# Altium PCB Sensor_breakout.PcbDoc
Units mm, origin at the board's own origin, x right, y up, seen from the top; angles counter-clockwise.
Board outline 28.19 x 26.52 mm, 2 copper layers (Top Layer, Bottom Layer); 7 components, 7 nets, 33 pads, 35 vias.
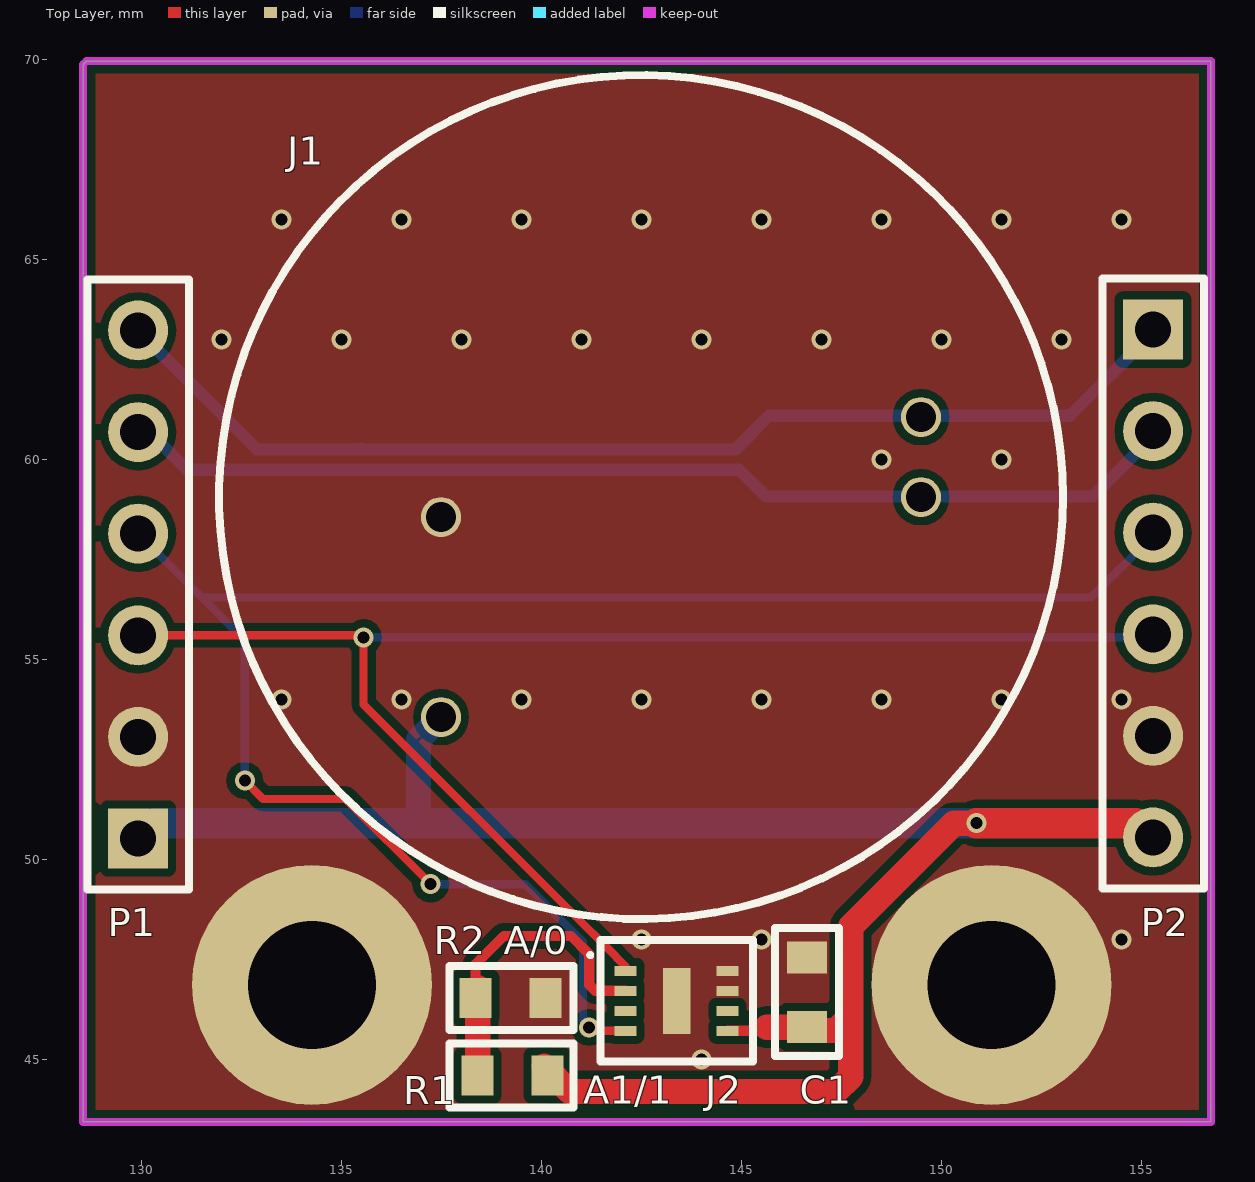
[diagram p0: Top Layer view]
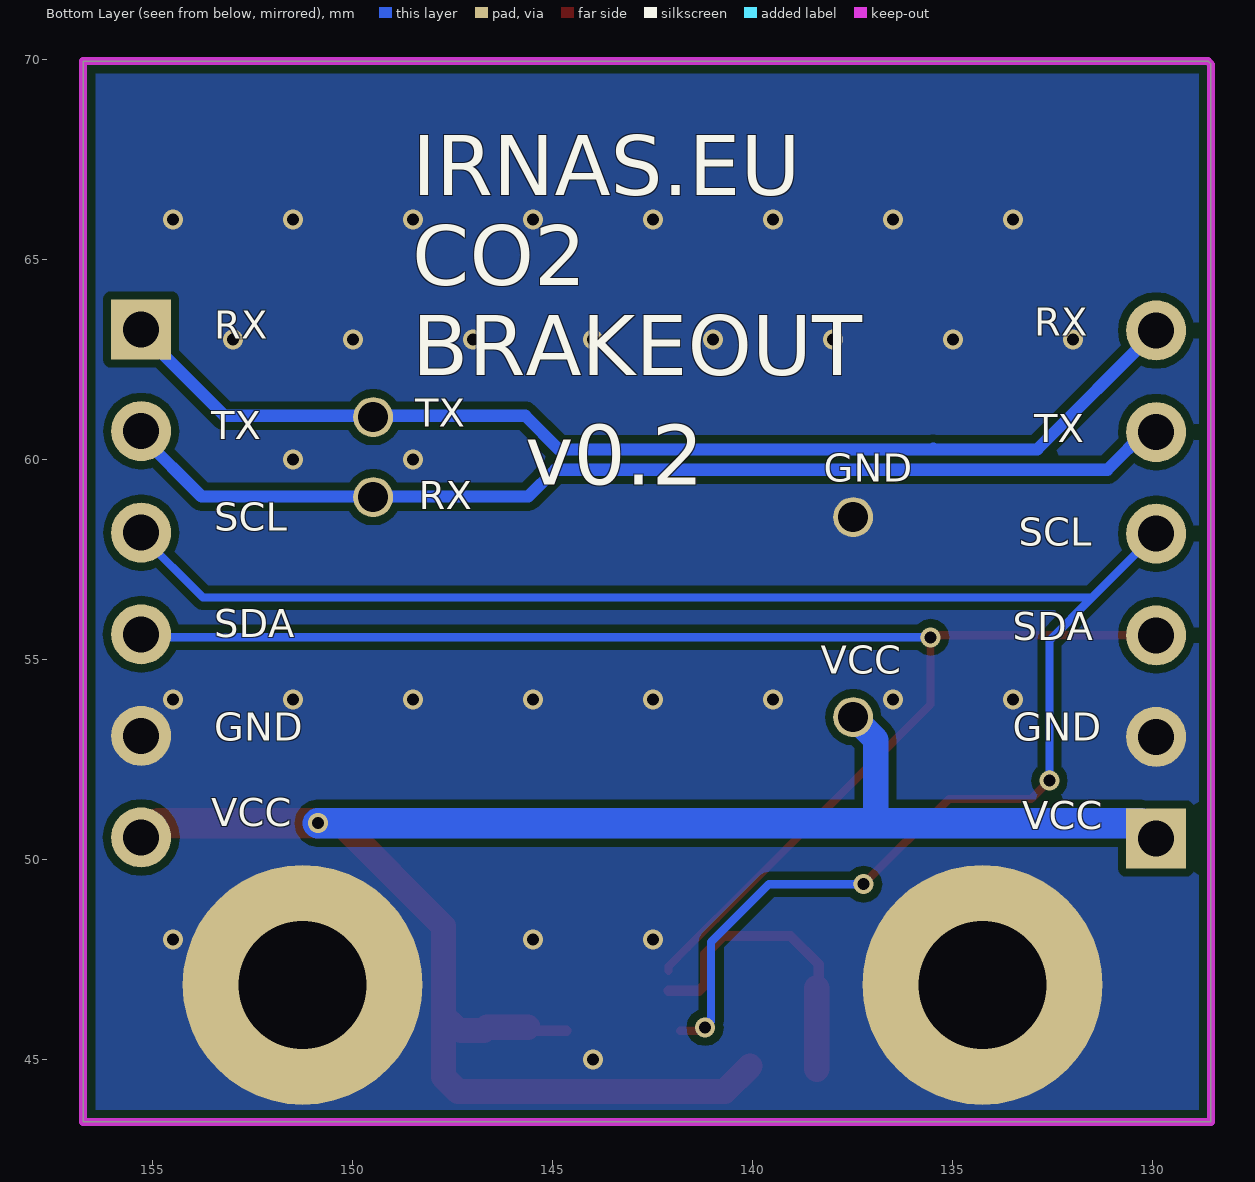
[diagram p1: Bottom Layer view, seen from below]

## Layer stack, top to bottom
Top Solder: solder mask 0.0102, Solder Resist, Dk 3.5
Top Layer: signal copper 0.0356
Dielectric 1: dielectric 0.32, FR-4, Dk 4.8
Bottom Layer: signal copper 0.0356
Bottom Solder: solder mask 0.0102, Solder Resist, Dk 3.5

## Board outline
128.549,43.434 156.743,43.434 156.743,69.952 128.626,69.952 128.549,69.875

## Design rules (kind name [scope] priority, off if disabled: settings)
Clearance [All] p1: gap=0.203 ignorepadtopadclearanceinfootprint=FALSE except(0: Arc-Hole Track-Hole SMDPad-Hole THPad-Hole Via-Hole Fill-Hole Poly-Hole Region-Hole Text-Hole)
HoleSize [All] p1: absolutevalues=TRUE maxlimit=4 minlimit=0.025 maxpercent=80.000 minpercent=20.000
MinimumSolderMaskSliver [All] p1: minsoldermaskwidth=0.025
PolygonConnect [All] p1: connectstyle=Direct reliefconductorwidth=0.254 reliefentries=4 polygonreliefangle="90 Angle" airgapwidth=0.254
RoutingVias [All] p1: holewidth=0.3 width=0.4 viastyle="Through Hole" minholewidth=0.3 minwidth=0.5 maxholewidth=0.3 maxwidth=0.5
SilkToSolderMaskClearance [IsPad] p1: minsilkscreentomaskgap=0.025 clearancetoexposedcopper=TRUE
SolderMaskExpansion [All] p1: expansion=0.102
Width [All] p1: maxlimit=0.762 minlimit=0.203 preferedwidth=0.305
27 further rules are at their usual default settings.

## Components (designator, comment, footprint, x,y, rotation, side; value= is the part's Value field where it differs from the comment)
C1 "100nF" CAP0603 146.685,46.787 r270 top
J1 "CO2" CO2 142.494,59.055 r0 top
J2 "Humidity and Temp sensor" SHT3x-DIS 143.408,46.406 r0 top
P1 "Header 6" HDR1X6 129.921,50.521 r90 top
P2 "Header 6" HDR1X6 155.296,63.246 r270 top
R1 "0R" RES0603 139.446,44.577 r0 top
R2 "0R" RES0603 139.065,46.558 r180 top

## Footprints (in the part's own frame and the unit in brackets; to place one, negate y for a bottom-side part, rotate by r counter-clockwise, add the part's x,y. Pads: shape width x height; smd on the part's side, far side on the other; paste and mask are expansions set on the pad)
CAP0603 [mm]
  rect 0.8x1 smd paste+0 mask+0.102: 1(-0.763,-0.04) 2(0.983,-0.04)
  silkscreen extent -1.49,-0.84 1.71,0.76, body extent -0.69,-0.44 0.91,0.36, height 0.45
CO2 [mm]
  round 1 hole 0.75: 1(-5,-0.5) 2(-5,-5.5) 3(7,0) 4(7,2)
  silkscreen extent -10.55,-10.55 10.55,10.55, body extent -10.45,-10.45 10.45,10.45, height 18.05
HDR1X6 [mm] "Connector; Header; 6 Position"
  rect 1.5x1.5 hole 0.9: 1(0,0)
  round 1.5 hole 0.9: 2(2.54,0) 3(5.08,0) 4(7.62,0) 5(10.16,0) 6(12.7,0)
  silkscreen extent -1.27,-1.27 13.97,1.27
RES0603 [mm]
  rect 0.8x1 smd paste+0 mask+0.102: 1(-1.039,0.02) 2(0.708,0.02)
  silkscreen extent -1.74,-0.78 1.36,0.82, body extent -0.97,-0.38 0.63,0.42, height 0.45
SHT3x-DIS [mm]
  rect 0.55x0.25 smd: 1(-1.3,0.807) 2(-1.3,0.307) 3(-1.3,-0.193) 4(-1.3,-0.693) 5(1.25,-0.693) 6(1.25,-0.193) 7(1.25,0.307) 8(1.25,0.807)
  rect 0.69x1.65 smd: 9(-0.025,0.057)
  silkscreen extent -2.23,-1.47 1.88,1.58, body extent -1.33,-1.24 1.27,1.36, height 0.8

## Part data
J2: library part "Humidity and Temp"
P1 P2: "Header, 6-Pin", LatestRevisionDate=17-Jul-2002, LatestRevisionNote="Re-released for DXP Platform.", Publisher="Altium Limited"
R1 R2: "Thick Film Resistors - SMD 0.0ohm 1%", Manufacturer=Yageo, Manufacturer Part Number=RC0603FR-070RL, Operating Temperature="-55°C ~ 155°C", Package / Case="0603 (1608 Metric)", Power (Watts)="0.1W, 1/10W", Resistance (Ohms)=0.0, Standard Package=5,000, Supplier Device Package=0603, Supplier Part Number 1=2309106, Temperature Coefficient=-, Tolerance=Jumper, Catalog Drawings="Thick Film Resistor Side", Category=Resistors, Composition="Thick Film", EDA / CAD Models="Download from Accelerated Designs", Family="Chip Resistor - Surface Mount", Features="Moisture Resistant", Height="0.022\" (0.55mm)", HTML Datasheet="RC Series, L Suffix Datasheet.html", Number of Terminations=2, Online Catalog="RC0603 Series", Other Names="311-0.0HRTR  Q3106287A  RC0603FR-070RL-ND", Packaging="Tape & Reel (TR)", PCN Other="RC/AC 0603/0805/1206 22/Jan/2013", Pricing 1="10=0.021, 100=0.018, 500=0.0126, 1000=0.0105, 2500=0.0079 (GBP)", Product Training Modules="Chip Resistor", Series=RC, Size / Dimension="0.063\" L x 0.031\" W (1.60mm x 0.80mm)", Stock 1=12704, Supplier 1=Farnell

## Free pads (board coordinates)
  round 6 hole 3.2: 2(151.257,46.863) 3(134.264,46.863)

## Via types
v1: diameter 0.5, hole 0.3, Top Layer to Bottom Layer, tented both sides, 35 vias

## Nets (pads, with @x,y where several pads share a name; then routed paths per layer and width w, separated by ;. In a path a pad name is that pad's centre, name@x,y a point inside that pad or via, vN(x,y) a via of type N, cw(c..) or ccw(c..) an arc to the next point about the centre after c; other vN are vias at no path point)
GND: C1.1 J1.1 J2.7 J2.8 J2.9 P1.2 P2.5 pad.2 pad.3 R2.1
  other v1: 144,45 142.5,48 145.5,48 154.5,48 133.5,54 136.5,54 139.5,54 142.5,54 145.5,54 148.5,54 151.5,54 154.5,54 148.5,60 151.5,60 132,63 135,63 138,63 141,63 144,63 147,63 150,63 153,63 133.5,66 136.5,66 139.5,66 142.5,66 145.5,66 148.5,66 151.5,66 154.5,66
NetJ2_2: J2.2 R1.1 R2.2 | length 7.6
  Top Layer w0.254: R2.2@138.357,46.843 138.357,47.375 139.065,48.082 140.741,48.082 141.199,47.625 141.199,46.863 141.349,46.713 J2.2
  Top Layer w0.635: R1.1@138.407,44.749 R2.2@138.407,46.793
RX: J1.3 P1.5 P2.2 | length 26.5
  Bottom Layer w0.305: P1.5@130.15,60.731 131.14,59.741 134.388,59.741 ; 134.389,59.74 135.484,59.74 144.945,59.74 145.616,59.069 153.786,59.069 P2.2@155.296,60.579
SCL: J2.4 P1.4 P2.3 | length 44.7
  Top Layer w0.203: v1(132.588,51.968) 133.045,51.511 135.103,51.511 v1(137.236,49.378) ; v1(141.199,45.796) 141.282,45.713 141.82,45.713
  Bottom Layer w0.203: P1.4 131.521,56.54 ; v1(132.588,51.968) 132.588,55.474 131.521,56.54 ; v1(137.236,49.378) 139.598,49.378 141.046,47.93 141.046,45.949 v1(141.199,45.796) ; P2.3@155.296,58.09 153.746,56.54 131.521,56.54
SDA: J2.1 P1.3 P2.4 | length 36.5
  Top Layer w0.203: P1.3 v1@135.56,55.601 ; v1(135.56,55.55) 135.56,53.873 140.919,48.514 ; 140.92,48.514 141.63,47.804 ; 141.63,47.803 142.108,47.325 J2.1 ; P2.4@155.245,55.601 P2.4@155.296,55.55
  Bottom Layer w0.203: v1(135.56,55.55) P2.4@155.296,55.55
TX: J1.4 P1.6 P2.1 | length 27.8
  Bottom Layer w0.305: P1.6 132.893,60.249 134.599,60.249 ; 134.599,60.248 135.484,60.248 135.484,60.252 ; 135.494,60.262 135.508,60.248 144.856,60.248 145.695,61.087 153.213,61.087 P2.1@155.296,63.17
VCC: C1.2 J1.2 J2.5 P1.1 P2.6 R1.2 | length 47.7
  Top Layer w0.254: J2.5 145.542,45.713 145.633,45.804
  Top Layer w0.635: R1.2@140.077,44.826 140.707,44.196 147.371,44.196 147.736,44.561 147.736,46.085 ; 145.633,45.804 C1.2 146.729,45.72 147.295,45.72 ; 147.455,45.804 147.736,46.085 ; v1(150.876,50.902) 150.317,50.902 147.736,48.321 147.736,46.085
  Top Layer w0.762: v1(150.876,50.902) 154.864,50.902 P2.6@155.296,50.47
  Bottom Layer w0.635: 136.931,50.902 136.931,52.992 J1.2
  Bottom Layer w0.762: P1.1 130.302,50.902 136.931,50.902 v1(150.876,50.902)
pads on no net: J2.3 J2.6

## Polygon pours and split planes (outlines as drawn)
GND on Bottom Layer "GND" (solid, pour order 1): 128.549,43.434 156.743,43.434 156.743,69.952 128.626,69.952 128.549,69.875
GND on Top Layer "GND" (solid, pour order 0): 128.549,43.434 156.743,43.434 156.743,69.952 128.626,69.952 128.549,69.875

## Keep-outs
Keep-Out Layer:
  lines w0.2: 128.549,43.434 156.743,43.434 156.743,69.952 142.723,69.952 128.626,69.952 128.549,69.875 128.549,43.434

## Other copper
Top Layer:
  region net SDA: 135.56,55.601

## Silkscreen, mask and mechanical layers (free items; w line width, h text height)
Top Overlay:
  text "A/0" at 139.065,47.625 h0.7
  text "A1/1" at 141.046,43.891 h0.7
Bottom Overlay:
  text "IRNAS.EU" at 148.514,66.599 h1.5
  text "RX" at 132.969,63.094 h0.7
  text "RX" at 153.467,63.017 h0.7
  text "CO2  / BRAKEOUT" at 148.514,62.103 h1.5
  text "TX" at 148.438,60.808 h0.7
  text "TX" at 153.543,60.503 h0.7
  text "TX" at 132.969,60.427 h0.7
  text "GND" at 138.227,59.436 h0.7
  text "v0.2" at 145.694,59.36 h1.5
  text "RX" at 148.361,58.75 h0.7
  text "SCL" at 153.467,58.217 h0.7
  text "SCL" at 133.35,57.836 h0.7
  text "SDA" at 153.467,55.55 h0.7
  text "SDA" at 133.502,55.474 h0.7
  text "VCC" at 138.303,54.635 h0.7
  text "GND" at 133.502,52.959 h0.7
  text "GND" at 153.467,52.959 h0.7
  text "VCC" at 153.543,50.825 h0.7
  text "VCC" at 133.274,50.749 h0.7

## Dimensions
128.626,69.952 to 128.549,43.434 on Mechanical 1
128.549,43.434 to 156.743,43.434 on Mechanical 1